# Altium PCB Nucleo-F303RE Extension Board.PcbDoc
Units mm, origin at the board's own origin, x right, y up, seen from the top; angles counter-clockwise.
Board outline 125 x 80 mm, 2 copper layers (Top Layer, Bottom Layer); 11 components, 22 nets, 129 pads, 145 vias.
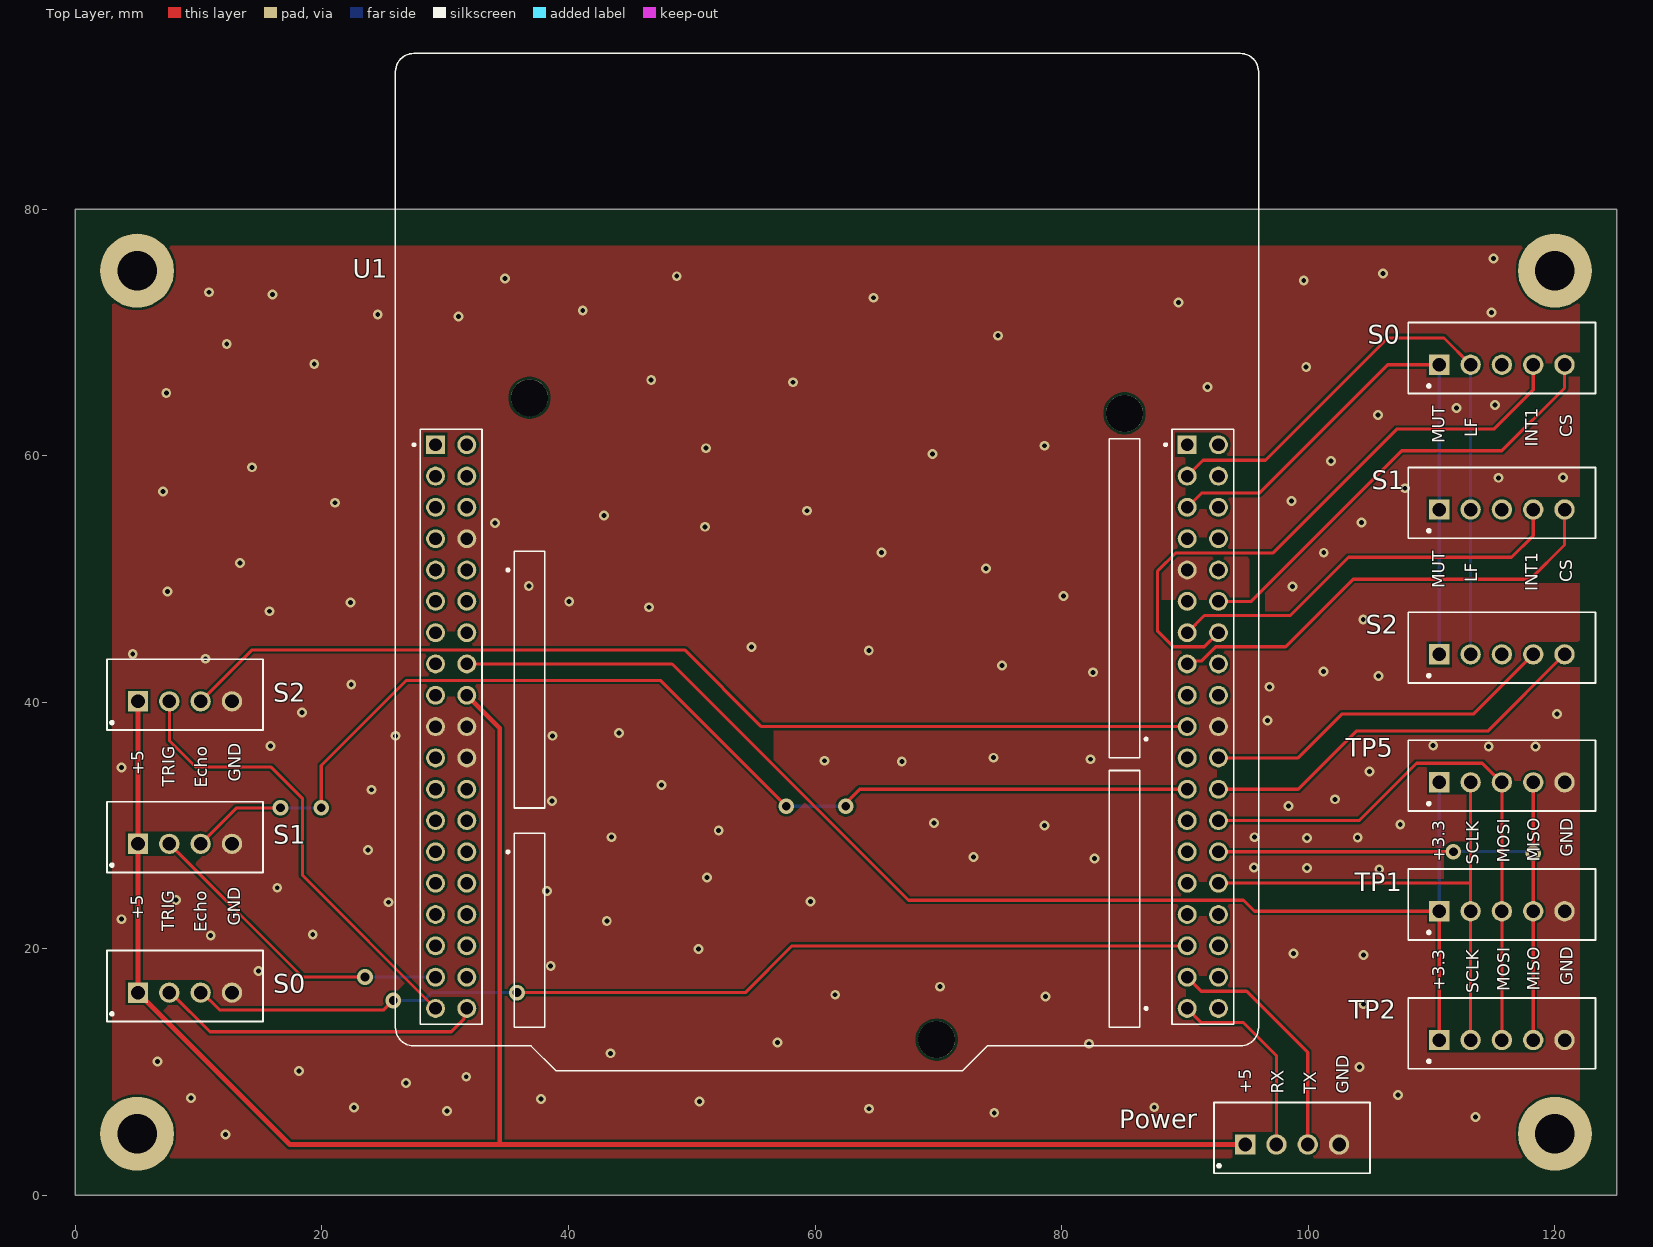
[diagram p0: Top Layer view]
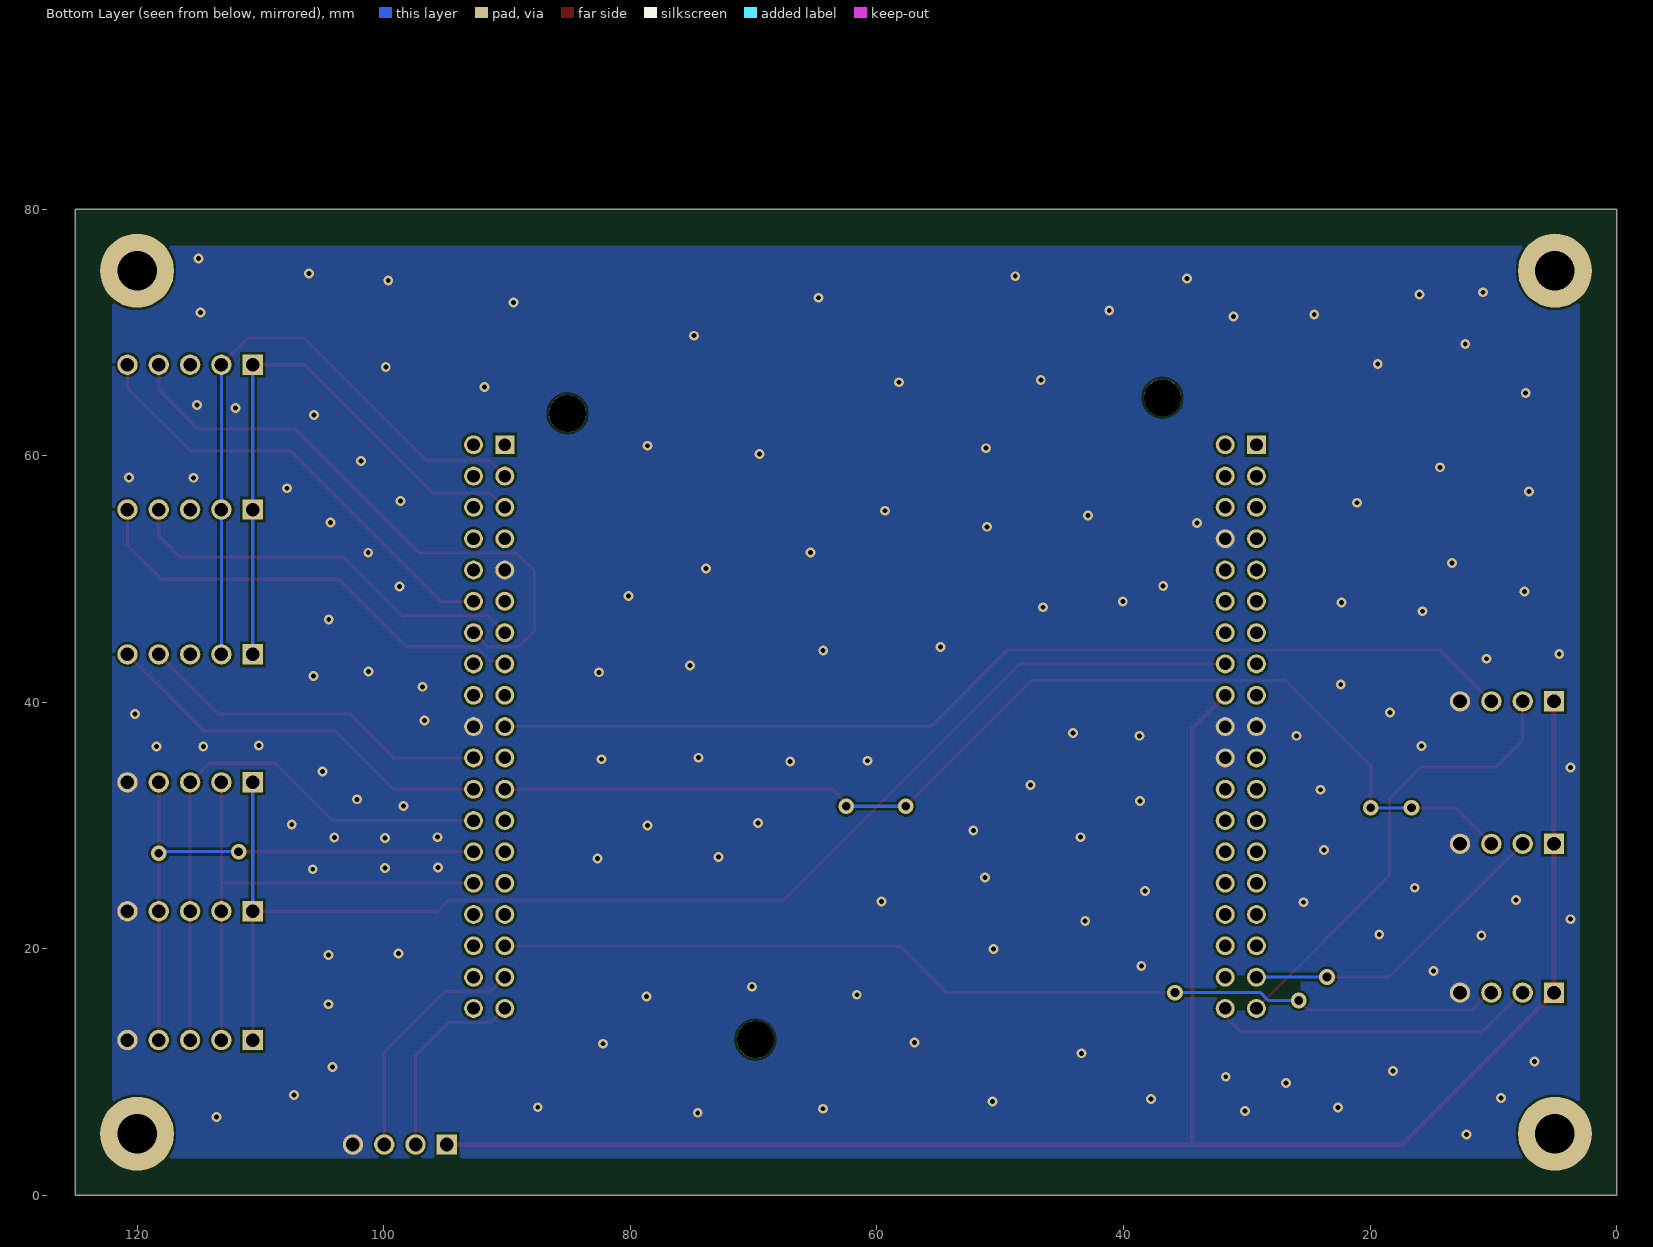
[diagram p1: Bottom Layer view, seen from below]
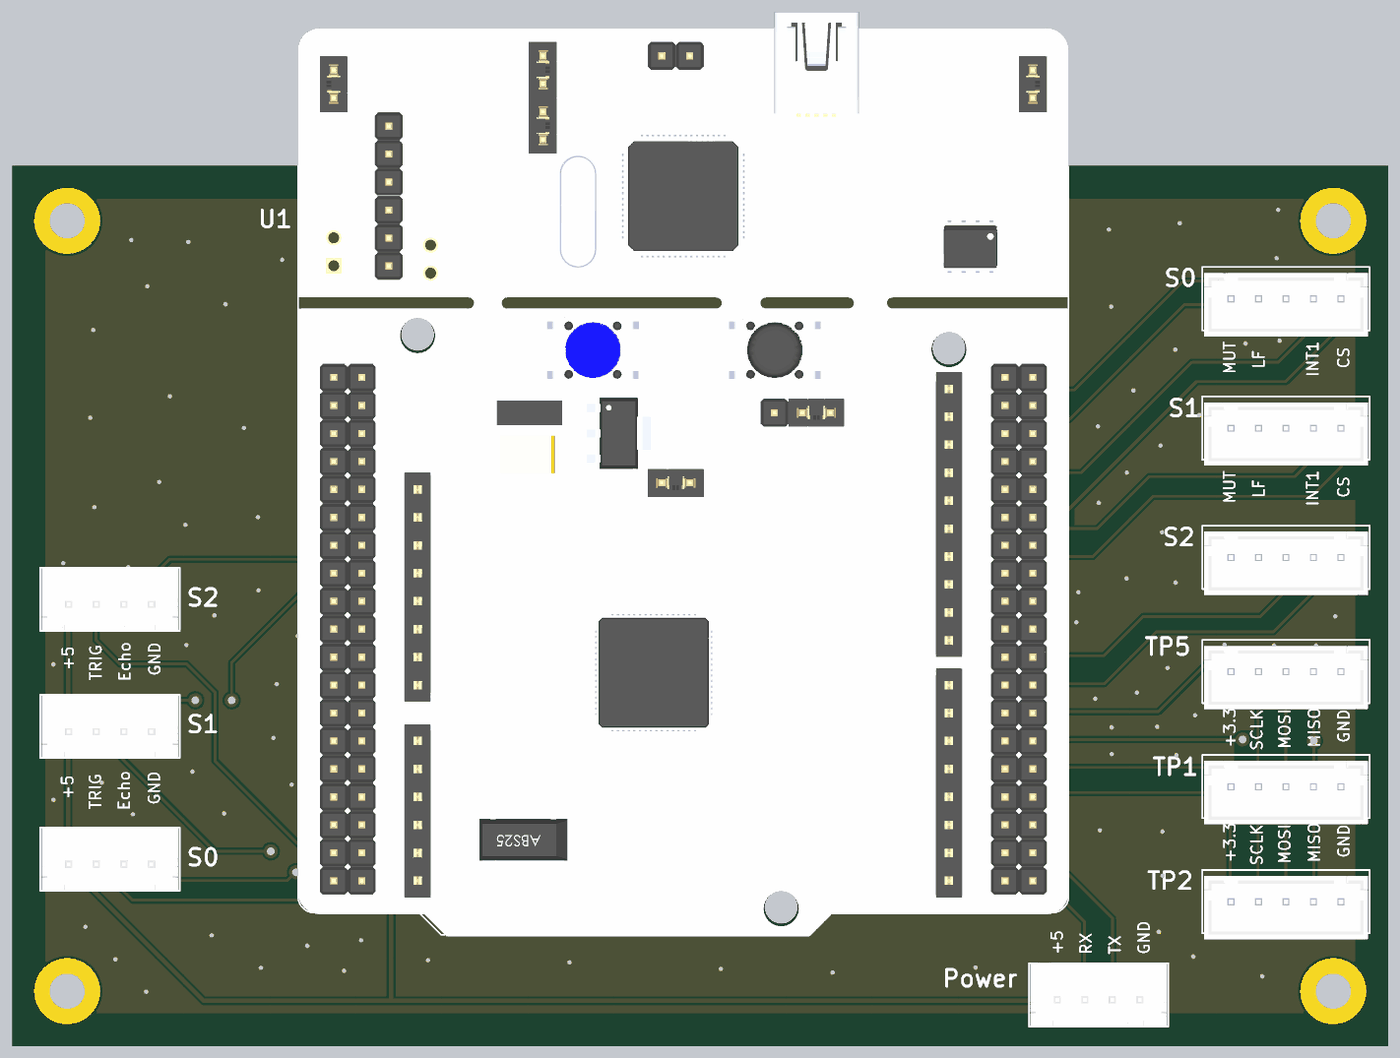
[diagram p2: 3D render of the assembled board from above, using the file's embedded part models]

## Layer stack, top to bottom
Top Solder: solder mask 0.0102, Solder Resist, Dk 3.5
Top Layer: signal copper 0.0356
Dielectric 1: dielectric 0.32, FR-4, Dk 4.8
Bottom Layer: signal copper 0.0356
Bottom Solder: solder mask 0.0102, Solder Resist, Dk 3.5

## Board outline
0,0 125,0 125,80 0,80

## Design rules (kind name [scope] priority, off if disabled: settings)
Clearance [All] p1: gap=0.2 ignorepadtopadclearanceinfootprint=FALSE except(0.15: Arc-SMDPad Arc-Text Track-SMDPad Track-Text SMDPad-SMDPad SMDPad-Text SMDPad-Hole THPad-Text Via-Text Fill-Text Poly-Text Region-Text; 0.16: Arc-Arc Arc-Track Track-Track)
HoleSize [All] p1: absolutevalues=TRUE maxlimit=6.3 minlimit=0.15 maxpercent=80.000 minpercent=20.000
MinimumSolderMaskSliver [All] p1: minsoldermaskwidth=0.15
PasteMaskExpansion [All] p1: expansion=0 thpadusetoppaste=TRUE thpadusebottompaste=TRUE
PlaneConnect [All] p1: planeconnectstyle=Direct reliefexpansion=0.508 reliefentries=4 reliefconductorwidth=0.254 reliefairgap=0.254
PolygonConnect [All] p1: connectstyle=Direct reliefconductorwidth=0.254 reliefentries=4 polygonreliefangle="90 Angle" airgapwidth=0.254
RoutingVias [All] p1: holewidth=0.4 width=0.8 viastyle="Through Hole" minholewidth=0.2 minwidth=0.4 maxholewidth=10 maxwidth=10
SMDEntry [All] p1: side=FALSE corner=FALSE anyangle=TRUE
SilkToSolderMaskClearance [IsPad] p1 off: minsilkscreentomaskgap=0.15 clearancetoexposedcopper=TRUE
SolderMaskExpansion [All] p1: expansion=0.038 istentingtop=FALSE
SupplyNets "Schematic Supply Nets_1" [InNet('+5')] p1: voltage=0.000
SupplyNets "Schematic Supply Nets_2" [InNet('+3.3')] p2: voltage=0.000
SupplyNets "Schematic Supply Nets" [InNet('GND')] p3: voltage=0.000
UnRoutedNet [All] p1: checkbadconnections=TRUE
Width [All] p1: maxlimit=0.5 minlimit=0.2 preferedwidth=0.2 minimp=50.000000 maximp=50.000000 favimp=50.000000
24 further rules are at their usual default settings.

## Classes and differential pairs
component class "Nucleo-F303RE extension board": Power S0 S1 S2 TP1 TP2 TP5 U1

## Components (designator, comment, footprint, x,y, rotation, side; value= is the part's Value field where it differs from the comment)
Power "LT - TestPointContact 4PIN" "New footprint 1"#1 98.679,4.127 r0 top (schematic designator TP10)
S0 "LT - TestPointContact 4PIN" "New footprint 1"#1 8.89,16.447 r0 top (schematic designator TP7)
S0 "LT testpoint Pin Header contact" "New footprint 1"#2 115.697,67.373 r0 top (schematic designator TP3)
S1 "LT testpoint Pin Header contact" "New footprint 1"#2 115.697,55.626 r0 top (schematic designator TP9)
S1 "LT - TestPointContact 4PIN" "New footprint 1"#1 8.89,28.511 r0 top (schematic designator TP6)
S2 "LT - TestPointContact 4PIN" "New footprint 1"#1 8.89,40.069 r0 top (schematic designator TP8)
S2 "LT testpoint Pin Header contact" "New footprint 1"#2 115.697,43.878 r0 top (schematic designator TP4)
TP1 "LT testpoint Pin Header contact" "New footprint 1"#2 115.697,23.05 r0 top
TP2 "LT testpoint Pin Header contact" "New footprint 1"#2 115.697,12.6 r0 top
TP5 "LT testpoint Pin Header contact" "New footprint 1"#2 115.697,33.5 r0 top
U1 "Nucleo-F303RE" "New footprint 1"#3 61.468,46.164 r0 top

## Footprints (in the part's own frame and the unit in brackets; to place one, negate y for a bottom-side part, rotate by r counter-clockwise, add the part's x,y. Pads: shape width x height; smd on the part's side, far side on the other; paste and mask are expansions set on the pad)
"New footprint 1"#1 [mm]
  rect 1.65x1.65 hole 1.1: 1(-3.81,0)
  round 1.65 hole 1.1: 2(-1.27,0) 3(1.27,0) 4(3.81,0)
  silkscreen extent -6.32,-2.33 6.33,3.42, body extent -6.3,-2.38 6.3,3.57, height 0.25
"New footprint 1"#2 [mm]
  rect 1.65x1.65 hole 1.1: 1(-5.08,0)
  round 1.65 hole 1.1: 2(-2.54,0) 3(0,0) 4(2.54,0) 5(5.08,0)
  silkscreen extent -7.6,-2.33 7.6,3.42, body extent -7.45,-2.88 7.45,2.88, height 7
"New footprint 1"#3 [mm]
  round 3 hole 3 unplated: 0(-24.638,18.527) 0(8.382,-33.528) 0(23.622,17.257)
  rect 1.53x1.53 / inner round 1.53 / far side rect 1.53x1.53 hole 1.02: 1(-32.258,14.717) 39(28.702,14.717)
  round 1.53 hole 1.02: 2(-29.718,14.717) 3(-32.258,12.177) 4(-29.718,12.177) 5(-32.258,9.637) 6(-29.718,9.637) 7(-32.258,7.097) 8(-29.718,7.097) 9(-32.258,4.557) 10(-29.718,4.557) 11(-32.258,2.017) 12(-29.718,2.017) 13(-32.258,-0.523) 14(-29.718,-0.523) 15(-32.258,-3.063) 16(-29.718,-3.063) 17(-32.258,-5.603) 18(-29.718,-5.603) 19(-32.258,-8.143) 20(-29.718,-8.143) 21(-32.258,-10.683) 22(-29.718,-10.683) 23(-32.258,-13.223) 24(-29.718,-13.223) 25(-32.258,-15.763) 26(-29.718,-15.763) 27(-32.258,-18.303) 28(-29.718,-18.303) 29(-32.258,-20.843) 30(-29.718,-20.843) 31(-32.258,-23.383) 32(-29.718,-23.383) 33(-32.258,-25.923) 34(-29.718,-25.923) 35(-32.258,-28.463) 36(-29.718,-28.463) 37(-32.258,-31.003) 38(-29.718,-31.003) 40(31.242,14.717) 41(28.702,12.177) 42(31.242,12.177) 43(28.702,9.637) 44(31.242,9.637) 45(28.702,7.097) 46(31.242,7.097) 47(28.702,4.557) 48(31.242,4.557) 49(28.702,2.017) 50(31.242,2.017) 51(28.702,-0.523) 52(31.242,-0.523) 53(28.702,-3.063) 54(31.242,-3.063) 55(28.702,-5.603) 56(31.242,-5.603) 57(28.702,-8.143) 58(31.242,-8.143) 59(28.702,-10.683) 60(31.242,-10.683) 61(28.702,-13.223) 62(31.242,-13.223) 63(28.702,-15.763) 64(31.242,-15.763) 65(28.702,-18.303) 66(31.242,-18.303) 67(28.702,-20.843) 68(31.242,-20.843) 69(28.702,-23.383) 70(31.242,-23.383) 71(28.702,-25.923) 72(31.242,-25.923) 73(28.702,-28.463) 74(31.242,-28.463) 75(28.702,-31.003) 76(31.242,-31.003)
  silkscreen extent -35.51,-36.04 34.49,46.46, body extent -35.51,-36.17 34.49,47.78, height 12.28

## Part data
Power S0 S1 S2: library part CMP-002-00081-2, "4Pin Testpoint contact"
S0 S1 S2 TP1 TP2 TP5: library part CMP-002-00080-3, "5 pin testpoint contact", Gender=F, Pins=5
U1: library part CMP-00030-00005-1, "LT - Nucleo-F303RE"

## Free pads (board coordinates)
  round 6 hole 3.2: 1(5,5) 2(120,5) 3(120,75) 4(5,75)

## Via types
v1: diameter 0.8, hole 0.4, Top Layer to Bottom Layer, tented both sides, 136 vias
v2: diameter 1.27, hole 0.711, Top Layer to Bottom Layer, tented both sides, 9 vias

## Nets (pads, with @x,y where several pads share a name; then routed paths per layer and width w, separated by ;. In a path a pad name is that pad's centre, name@x,y a point inside that pad or via, vN(x,y) a via of type N, cw(c..) or ccw(c..) an arc to the next point about the centre after c; other vN are vias at no path point)
0_CS_B: S0.5 U1.50 | length 37.1
  Top Layer w0.254: U1.50 95.362,48.181 107.569,60.389 115.697,60.389 120.777,65.468 S0.5
0_ECHO: S0.3@10.16,16.447 U1.71 | length 82.6
  Top Layer w0.254: S0.3@10.287,16.447 11.684,15.05 25.019,15.05 v2(25.781,15.811) ; v2(35.814,16.447) 54.328,16.447 58.123,20.241 U1.71
  Bottom Layer w0.254: v2(25.781,15.811) 28.239,15.811 28.874,16.447 v2(35.814,16.447)
0_INT1: S0.4@118.237,67.373 U1.52 | length 49.4
  Top Layer w0.254: U1.52 91.564,44.495 89.045,44.495 87.757,45.783 87.757,50.609 89.263,52.115 97.137,52.115 107.168,62.146 115.042,62.146 118.237,65.341 S0.4@118.237,67.373
0_TRIG: S0.2@7.62,16.447 U1.38 | length 26.5
  Top Layer w0.254: S0.2@7.747,16.447 10.922,13.271 30.48,13.271 31.506,14.297 31.506,14.917 U1.38
1_CS_B: S1.5 U1.53 | length 37.5
  Top Layer w0.254: U1.53 90.397,43.328 91.316,43.328 92.483,44.495 98.153,44.495 103.632,49.974 117.999,49.974 120.777,52.752 S1.5
1_ECHO: S1.3@10.16,28.511 U1.61 | length 92.5
  Top Layer w0.254: S1.3@10.16,28.511 13.081,31.432 v2(16.637,31.432) ; v2(19.939,31.432) 19.939,34.861 26.85,41.772 47.445,41.772 v2(57.658,31.559) ; v2(62.484,31.559) 62.484,31.813 63.612,32.941 U1.61
  Bottom Layer w0.254: v2(16.637,31.432) v2(19.939,31.432) ; v2(57.658,31.559) v2(62.484,31.559)
1_INT1: S1.4@118.237,55.626 U1.51 | length 33.4
  Top Layer w0.254: U1.51 91.564,47.035 98.534,47.035 103.251,51.752 116.478,51.752 118.237,53.512 S1.4@118.237,55.626
1_TRIG: S1.2@7.62,28.511 U1.35 | length 26.1
  Top Layer w0.254: S1.2@7.62,28.511 18.415,17.716 v2(23.495,17.716)
  Bottom Layer w0.254: v2(23.495,17.716) 23.503,17.709 29.202,17.709 U1.35
2_CS_B: S2.5 U1.62 | length 32.6
  Top Layer w0.254: U1.62 99.172,32.941 103.886,37.655 114.554,37.655 S2.5
2_ECHO: S2.3@10.16,40.069 U1.57 | length 84.3
  Top Layer w0.254: S2.3@10.16,40.069 14.339,44.247 49.415,44.247 55.641,38.021 U1.57
2_INT1: S2.4@118.237,43.878 U1.60 | length 29
  Top Layer w0.254: U1.60 99.172,35.481 102.743,39.052 113.411,39.052 S2.4@118.237,43.878
2_TRIG: S2.2@7.62,40.069 U1.37 | length 37.8
  Top Layer w0.254: S2.2@7.887,39.801 7.62,40.069 7.62,36.893 9.779,34.734 15.875,34.734 18.426,32.183 18.426,25.945 U1.37
+3.3: TP1.1 TP2.1 TP5.1 U1.16 | length 107.8
  Top Layer w0.254: U1.16 48.402,43.101 67.564,23.939 94.742,23.939 95.631,23.05 TP1.1@110.49,23.05 ; TP2.1@110.617,12.725 TP1.1
  Bottom Layer w0.254: TP1.1 TP5.1
+5: Power.1 S0.1@5.08,16.447 S1.1@5.08,28.511 S2.1@5.08,40.069 U1.18 | length 156.1
  Top Layer w0.4: S0.1@5.08,16.447 17.399,4.127 34.417,4.127 ; S2.1@5.08,40.069 5.08,28.511 5.08,16.573 S0.1@5.207,16.447 ; U1.18 34.417,37.894 34.417,4.127 ; Power.1 34.417,4.127
GND: Power.4 S0.4@12.7,16.447 S1.4@12.7,28.511 S2.4@12.7,40.069 TP1.5 TP2.5 TP5.5 U1.8 U1.19 U1.20 U1.22 U1.47 U1.58
  other v1: 12.175,4.95 113.55,6.35 74.525,6.7 30.15,6.85 64.375,7.025 22.6,7.125 87.5,7.15 50.625,7.625 37.775,7.825 9.375,7.9 107.275,8.15 26.8,9.125 31.7,9.625 18.125,10.075 104.15,10.4 6.65,10.85 43.4,11.525 82.2,12.3 56.95,12.4 104.475,15.5 78.675,16.125 61.625,16.275 70.125,16.925 14.85,18.2 38.55,18.6 104.475,19.5 98.8,19.625 50.55,19.975 10.975,21.075 19.25,21.15 43.1,22.25 3.75,22.4 25.4,23.775 59.625,23.85 8.15,23.95 38.25,24.675 16.375,24.95 51.225,25.775 105.75,26.45 99.875,26.55 95.6,26.6 82.65,27.325 72.85,27.45 23.725,28.025 99.875,28.975 104,29.025 43.475,29.05 95.625,29.05 52.175,29.6 78.6,30 107.45,30.075 69.65,30.2 98.375,31.575 38.65,31.975 102.15,32.125 24.025,32.9 47.525,33.275 104.95,34.375 3.75,34.7 67.025,35.2 60.75,35.25 82.325,35.375 74.45,35.5 114.625,36.4 118.425,36.4 15.825,36.45 110.125,36.475 25.95,37.275 38.7,37.275 44.075,37.5 96.675,38.525 120.175,39.05 18.375,39.15 96.85,41.25 22.375,41.425 105.675,42.125 82.525,42.425 101.225,42.5 75.15,42.975 10.55,43.525 4.65,43.9 64.35,44.2 54.85,44.475 104.45,46.7 15.75,47.375 46.525,47.7 22.325,48.075 40.05,48.175 80.15,48.625 7.475,48.975 98.7,49.375 36.775,49.425 73.85,50.85 13.35,51.275 101.25,52.125 65.375,52.15 51.075,54.225 34.025,54.525 104.3,54.575 42.875,55.15 59.325,55.525 21.05,56.175 98.625,56.325 7.1,57.1 107.825,57.35 115.425,58.2 120.65,58.225 14.325,59.05 101.85,59.575 69.525,60.125 51.15,60.6 78.6,60.8 105.65,63.3 112.025,63.85 115.125,64.1 7.375,65.075 91.825,65.55 58.2,65.95 46.7,66.125 99.825,67.2 19.375,67.425 12.275,69.05 74.825,69.725 31.075,71.275 24.525,71.45 114.85,71.6 41.15,71.775 89.475,72.425 64.725,72.8 16,73.075 10.825,73.25 99.625,74.2 34.85,74.375 48.775,74.55 106.05,74.775 115,76
LFCLK: S0.2@113.157,67.373 S1.2@113.157,55.626 S2.2@113.157,43.878 U1.41 | length 52
  Top Layer w0.254: U1.41 91.455,59.627 96.52,59.627 106.426,69.532 110.998,69.532 S0.2@113.157,67.373
  Bottom Layer w0.254: S2.2@113.157,43.878 113.157,56.769 S0.2@113.157,67.373
MISO: TP1.4 TP2.4 TP5.4 U1.66 | length 46.5
  Top Layer w0.254: U1.66 92.718,27.869 111.752,27.869 v2(111.76,27.877) ; TP2.4 TP1.4 TP5.4
  Bottom Layer w0.254: v2(111.76,27.877) 118.11,27.877 v2(118.237,27.749)
MOSI: TP1.3 TP2.3 TP5.3 U1.64 | length 46.5
  Top Layer w0.254: U1.64 104.125,30.401 108.774,35.05 114.111,35.05 TP5.3@115.697,33.465 ; TP2.3 TP5.3
MUTCLK: S0.1@110.617,67.373 S1.1@110.617,55.626 S2.1@110.617,43.878 U1.43 | length 48.7
  Top Layer w0.254: U1.43 91.328,56.959 96.012,56.959 106.426,67.373 S0.1@110.617,67.373
  Bottom Layer w0.254: S2.1@110.617,43.878 110.617,56.769 S0.1@110.617,67.373
SCLK: TP1.2 TP2.2 TP5.2 U1.68 | length 40.6
  Top Layer w0.254: U1.68@92.718,25.329 113.157,25.329 ; TP2.2@113.157,12.725 TP1.2 113.157,25.329 ; TP5.2@113.157,32.891 113.157,25.329
USART2_RX: Power.2 U1.75 | length 16
  Top Layer w0.254: U1.75 91.316,14.015 94.742,14.015 97.409,11.348 Power.2
USART2_TX: Power.3 U1.73 | length 19.8
  Top Layer w0.254: U1.73 91.316,16.555 94.996,16.555 99.949,11.602 Power.3
pads on no net: S0.3@115.697,67.373 S1.3@115.697,55.626 S2.3@115.697,43.878 U1.0 U1.1 U1.2 U1.3 U1.4 U1.5 U1.6 U1.7 U1.9 U1.10 U1.11 U1.12 U1.13 U1.14 U1.15 U1.17 U1.21 U1.23 U1.24 U1.25 U1.26 U1.27 U1.28 U1.29 U1.30 U1.31 U1.32 U1.33 U1.34 U1.36 U1.39 U1.40 U1.42 U1.44 U1.45 U1.46 U1.48 U1.49 U1.54 U1.55 U1.56 U1.59 U1.63 U1.65 U1.67 U1.69 U1.70 U1.72 U1.74 U1.76

## Polygon pours and split planes (outlines as drawn)
GND on Top Layer "GND_L01_P000" (solid, remove dead copper, pour order 0): 3,3 122,3 122,77 3,77 3,82
GND on Bottom Layer "GND_L02_P001" (solid, remove dead copper, pour order 1): 3,3 122,3 122,77 3,77 3,82

## Other copper
Top Layer:
  pour cut-out: 110.993,27.536 110.993,25.657 111.025,25.625 111.062,25.662 112.824,25.662 112.824,28.724 112.811,28.711 111.87,28.711 111.87,28.495 111.4,28.025
  pour cut-out: 119.262,67.239 119.752,67.239 119.752,67.508 119.262,67.508
  pour cut-out: 95.224,48.515 95.224,51.774 95.3,51.85 95.368,51.782 97.137,51.782 97.137,51.538 97.7,50.975
  pour cut-out: 92.583,33.906 92.837,33.906 92.837,34.516 92.583,34.516
  pour cut-out: 91.745,42.974 91.135,42.974 91.135,42.995 91.297,43.157 91.762,43.157
  pour cut-out: 91.745,55.929 91.135,55.929 91.135,55.674 91.745,55.674
  pour cut-out: 91.135,53.389 91.135,53.134 91.745,53.134 91.745,53.389
  pour cut-out: 91.135,61.846 92.583,61.846 91.99,61.254 91.104,61.254 91.1,61.25
  pour cut-out: 90.043,59.306 90.297,59.306 90.297,59.972 90.325,60 90.05,60
  pour cut-out: 90.043,57.376 90.043,56.766 90.297,56.766 90.297,57.376
  pour cut-out: 120.912,68.398 122.098,68.398 122.1,68.4 122.3,68.2 122.3,66.45 122.252,66.402 121.11,66.402
  pour cut-out: 111.642,66.349 113.022,66.349 112.626,66.744 111.656,66.744 111.65,66.75
  pour cut-out: 95.894,5.152 97.092,5.152 97.142,5.102 96.988,4.948 95.877,4.948 95.875,4.95
  pour cut-out: 30.175,40.434 30.785,40.434 30.785,40.689 30.175,40.689
  pour cut-out: 30.175,45.769 30.175,45.514 30.785,45.514 30.785,45.769
  pour cut-out: 116.722,33.635 116.722,33.365 117.212,33.365 117.212,33.635
  pour cut-out: 111.642,11.575 118.102,11.575 118.102,12.352 118.15,12.4 118.05,12.5 111.65,12.5
  pour cut-out: 113.49,32.528 115.364,32.528 114.787,33.104 114.112,33.104
  pour cut-out: 111.642,32.475 112.838,32.475 112.881,32.517 112.673,32.725 111.625,32.725
  pour cut-out: 89.205,48.309 88.084,48.309 88.075,48.3 88.075,48.05 89.201,48.05 89.205,48.054
  pour cut-out: 91.745,48.309 91.135,48.309 91.135,48.054 91.745,48.054
  pour cut-out: 96.475,48.825 96.5,48.8 96.5,47.375 95.875,47.375 95.95,47.45 95.95,48.35
  pour cut-out: 120.912,44.903 120.912,42.854 120.915,42.85 122.05,42.85 122.05,44.9
  pour cut-out: 90.043,16.736 90.043,16.126 90.297,16.126 90.297,16.736
  pour cut-out: 91.135,17.829 91.135,17.574 91.745,17.574 91.745,17.829
  pour cut-out: 91.135,22.654 91.745,22.654 91.745,22.909 91.135,22.909
  pour cut-out: 91.135,25.449 91.745,25.449 91.745,25.194 91.135,25.194
  pour cut-out: 118.372,44.903 120.642,44.903 120.625,44.886 120.625,44.125 118.375,44.125 118.35,44.15
  pour cut-out: 118.372,56.651 120.642,56.651 120.642,56.167 120.275,55.8 119,55.8
  pour cut-out: 120.912,56.651 122.099,56.651 122.25,56.5 122.25,55.775 121.25,55.775 121.225,55.8
  pour cut-out: 117.999,49.641 122.066,49.641 122.15,49.725 121.05,50.825 119.225,50.825 118.8,50.4
  pour cut-out: 56.625,37.675 56.625,35.55 56.625,35.334 55.175,36.85 55.175,37.222 55.641,37.688
  pour cut-out: 58.326,31.047 59.129,31.85 59.1,31.85 58.35,32.6 58.171,32.421 58.171,32.228
  pour cut-out: 29.337,16.126 31.623,16.126 31.25,15.754 31.25,15.225 30.239,15.225 30.175,15.289
  pour cut-out: 26.103,16.59 26.7,17.186 26.7,17.2 27.1,16.8 26.624,16.324 26.449,16.324
  pour cut-out: 7.755,17.471 10.025,17.471 10.025,15.422 7.755,15.422
  pour cut-out: 6.105,17.471 7.485,17.471 7.485,15.335 7.1,14.95 6.105,15.945 6.105,15.998
  pour cut-out: 8.543,28.06 9.677,26.927 10.295,27.487 9.205,28.116 9.205,28.722 10.019,29.536 7.755,29.536 8.645,29.275 8.645,28.646
  pour cut-out: 6.105,27.487 7.294,27.487 6.665,28.116 6.665,29.006 7.485,29.536 6.105,29.536
Bottom Layer:
  pour cut-out: 30.175,15.289 30.175,15.034 30.785,15.034 30.785,15.289
  pour cut-out: 30.175,17.829 30.785,17.829 30.785,17.574 30.175,17.574
  pour cut-out: 25.671,16.646 25.671,17.371 25.75,17.45 25.975,17.45 25.975,16.731 25.891,16.646

## Silkscreen, mask and mechanical layers (free items; w line width, h text height)
Top Overlay:
  text "LF" at 113.7,61.483 h1 r90
  text "CS" at 121.4,61.483 h1 r90
  text "MUT" at 111.05,60.983 h1 r90
  text "INT1" at 118.6,60.733 h1 r90
  text "LF" at 113.7,49.735 h1 r90
  text "CS" at 121.4,49.735 h1 r90
  text "MUT" at 111.05,49.235 h1 r90
  text "INT1" at 118.6,48.985 h1 r90
  text "+5" at 5.55,34.065 h1 r90
  text "GND" at 13.425,33.565 h1 r90
  text "TRIG" at 8.075,33.148 h1 r90
  text "Echo" at 10.7,33.065 h1 r90
  text "GND" at 121.425,27.474 h1 r90
  text "+3.3" at 111.075,27.058 h1 r90
  text "MISO" at 118.75,27.058 h1 r90
  text "MOSI" at 116.35,26.991 h1 r90
  text "SCLK" at 113.825,26.824 h1 r90
  text "+5" at 5.5,22.35 h1 r90
  text "GND" at 13.375,21.85 h1 r90
  text "TRIG" at 8.025,21.433 h1 r90
  text "Echo" at 10.65,21.35 h1 r90
  text "GND" at 121.425,17.025 h1 r90
  text "+3.3" at 111.075,16.608 h1 r90
  text "MISO" at 118.75,16.608 h1 r90
  text "MOSI" at 116.35,16.542 h1 r90
  text "SCLK" at 113.825,16.375 h1 r90
  text "+5" at 95.375,8.25 h1 r90
  text "RX" at 98.008,8.25 h1 r90
  text "TX" at 100.642,8.25 h1 r90
  text "GND" at 103.275,8.25 h1 r90